# EAGLE board oldclock (EAGLE 7.3.0)

Size 100 x 80 mm. Coordinates in mm from the lower left corner, seen from the top.
Outline: 0,0 100,0 100,80 0,80 0,0
Copper layers (1*16): Top 0.035mm / dielectric 1.5mm / Bottom 0.035mm
Design rules "default": minimum track width 10mil, minimum drill 24mil, track to track 8mil, track to pad 8mil, pad to pad 8mil, via to via 8mil, smd to smd 8mil, copper to edge 40mil, drill to drill 8mil, minimum pad ring 10mil, minimum via ring 8mil, stop-mask expansion 4mil, vias tented up to drill 0mil, thermal gap 10mil

## Footprints (pad centres in the part's own frame; a part is rotated, then mirrored left to right if it is on the bottom)
DIP08 = drill 0.813 pad 1.727 octagon: 1 -3.81,-3.81; 2 -1.27,-3.81; 3 1.27,-3.81; 4 3.81,-3.81; 5 3.81,3.81; 6 1.27,3.81; 7 -1.27,3.81; 8 -3.81,3.81
CAP-PTH-SMALL = drill 0.7 pad 1.651: 1 0,0; 2 2.54,0
BANANA_CONN = drill 3.81 pad 5.461: P$1 0,0
DIL16 = drill 0.813 long: 1 -8.89,-3.81; 2 -6.35,-3.81; 3 -3.81,-3.81; 4 -1.27,-3.81; 5 1.27,-3.81; 6 3.81,-3.81; 7 6.35,-3.81; 8 8.89,-3.81; 9 8.89,3.81; 10 6.35,3.81; 11 3.81,3.81; 12 1.27,3.81; 13 -1.27,3.81; 14 -3.81,3.81; 15 -6.35,3.81; 16 -8.89,3.81
1X30 = drill 1.016 pad 1.88: 1 0,0; 2 2.54,0; 3 5.08,0; 4 7.62,0; 5 10.16,0; 6 12.7,0; 7 15.24,0; 8 17.78,0; 9 20.32,0; 10 22.86,0; 11 25.4,0; 12 27.94,0; 13 30.48,0; 14 33.02,0; 15 35.56,0; 16 38.1,0; 17 40.64,0; 18 43.18,0; 19 45.72,0; 20 48.26,0; 21 50.8,0; 22 53.34,0; 23 55.88,0; 24 58.42,0; 25 60.96,0; 26 63.5,0; 27 66.04,0; 28 68.58,0; 29 71.12,0; 30 73.66,0
1X04 = drill 1.016 pad 1.88 square: 1 0,0 | drill 1.016 pad 1.88: 2 2.54,0; 3 5.08,0; 4 7.62,0
AXIAL-0.4 = drill 0.9 pad 1.88: P$1 -5.08,0; P$2 5.08,0

## Placement (x,y rotation side)
ATTINY85MASTER  TINY85-20-DIP  [DIP08]  72.39,45.72 0 top
ATTINY85SLAVE  TINY85-20-DIP  [DIP08]  91.44,45.72 0 top
C1  0.1 uF  [CAP-PTH-SMALL]  95.25,59.69 0 top
GND  [BANANA_CONN]  96.52,67.31 0 top
IC1  74LS595N  [DIL16]  12.7,33.02 0 top
IC2  74LS595N  [DIL16]  36.83,33.02 0 top
IC3  74LS595N  [DIL16]  62.23,33.02 0 top
IC4  ULN2003AN  [DIL16]  12.7,17.78 0 top
IC5  ULN2003AN  [DIL16]  36.83,17.78 0 top
IC6  ULN2003AN  [DIL16]  60.96,17.78 0 top
IC7  ULN2003AN  [DIL16]  86.36,17.78 0 top
IC8  74LS595N  [DIL16]  86.36,33.02 0 top
JP1  [1X30]  2.54,2.54 0 top
JP2  DS3231  [1X04]  3.81,44.45 0 top
R1  4.7K  [AXIAL-0.4]  91.44,7.62 0 top
R2  4.7K  [AXIAL-0.4]  76.2,7.62 0 top
R3  10K  [AXIAL-0.4]  53.34,41.91 0 top
VCC  [BANANA_CONN]  95.25,74.93 0 top

## Library data of the parts
ATTINY85MASTER ATTINY85SLAVE = SparkFun-DigitalIC; PROD_ID: IC-09445
C1 = SparkFun-Capacitors
GND JP1 JP2 VCC = SparkFun-Connectors
IC1-IC3 IC8 = SparkFun-DigitalIC
IC4-IC7 = uln-udn
R1-R3 = SparkFun-Resistors

## Nets
GND: ATTINY85MASTER.4 ATTINY85SLAVE.4 C1.2 GND.P$1 IC1.8 IC2.8 IC3.8 IC4.8 IC5.8 IC6.8 IC7.8 IC8.8 JP2.1
HALF: IC4.15 JP1.2
N$1: ATTINY85MASTER.5 ATTINY85SLAVE.5 JP2.3 R1.P$1
N$2: ATTINY85MASTER.7 ATTINY85SLAVE.7 JP2.4 R2.P$1
N$3: IC1.9 IC2.14
N$4: IC1.13 IC2.13 IC3.13
N$5: IC2.9 IC3.14
N$6: ATTINY85MASTER.1 ATTINY85SLAVE.1 R3.P$2
N$7: IC1.15 IC4.1
N$8: IC1.1 IC4.2
N$9: IC1.2 IC4.3
N$10: IC1.3 IC4.4
N$11: IC1.4 IC4.5
N$12: IC1.5 IC4.6
N$13: IC1.6 IC4.7
N$14: ATTINY85MASTER.2 IC1.14
N$15: IC1.7 IC5.1
N$16: IC2.15 IC5.2
N$17: IC2.1 IC5.3
N$18: IC2.2 IC5.4
N$19: IC2.3 IC5.5
N$20: IC2.4 IC5.6
N$21: IC2.5 IC5.7
N$22: IC2.7 IC6.2
N$23: IC2.6 IC6.1
N$24: IC3.15 IC6.3
N$25: IC3.1 IC6.4
N$26: IC3.2 IC6.5
N$27: IC3.3 IC6.6
N$28: IC3.4 IC6.7
N$29: IC3.9 IC8.14
N$30: IC7.4 IC8.15
N$31: IC7.5 IC8.1
N$32: IC7.6 IC8.2
N$33: IC7.7 IC8.3
N$34: IC3.5 IC7.1
N$35: IC3.6 IC7.2
N$36: IC3.7 IC7.3
N$39: IC4.14 JP1.3
N$40: IC4.13 JP1.4
N$41: IC4.12 JP1.5
N$42: IC4.11 JP1.6
N$43: IC4.10 JP1.7
N$45: IC5.16 JP1.9
N$46: IC5.15 JP1.10
N$47: IC5.14 JP1.11
N$48: IC5.13 JP1.12
N$49: IC5.12 JP1.13
N$50: IC5.11 JP1.14
N$51: IC5.10 JP1.15
N$52: IC7.16 JP1.24
N$53: IC6.16 JP1.17
N$54: IC6.15 JP1.18
N$55: IC6.14 JP1.19
N$56: JP1.20
N$57: IC6.12 JP1.21
N$58: IC6.11 JP1.22
N$59: IC6.10 JP1.23
N$60: IC7.15 JP1.25
N$61: IC7.14 JP1.26
N$62: IC7.13 JP1.27
N$63: IC7.12 JP1.28
N$64: IC7.11 JP1.29
N$65: IC7.9 JP1.30
TEN: IC4.16 JP1.1
VCC: ATTINY85MASTER.8 ATTINY85SLAVE.8 C1.1 IC1.16 IC2.16 IC3.16 IC8.16 JP2.2 R1.P$2 R2.P$2 R3.P$1 VCC.P$1

## Tracks (layer width: path | path; a pad name or v marks a point on that pad's centre or on a via)
GND  (12 unrouted)
HALF  (1 unrouted)
N$1  (3 unrouted)
N$2  (3 unrouted)
N$3  (1 unrouted)
N$4  (2 unrouted)
N$5  (1 unrouted)
N$6  (2 unrouted)
N$7  (1 unrouted)
N$8  (1 unrouted)
N$9  (1 unrouted)
N$10  (1 unrouted)
N$11  (1 unrouted)
N$12  (1 unrouted)
N$13  (1 unrouted)
N$14  (1 unrouted)
N$15  (1 unrouted)
N$16  (1 unrouted)
N$17  (1 unrouted)
N$18  (1 unrouted)
N$19  (1 unrouted)
N$20  (1 unrouted)
N$21  (1 unrouted)
N$22  (1 unrouted)
N$23  (1 unrouted)
N$24  (1 unrouted)
N$25  (1 unrouted)
N$26  (1 unrouted)
N$27  (1 unrouted)
N$28  (1 unrouted)
N$29  (1 unrouted)
N$30  (1 unrouted)
N$31  (1 unrouted)
N$32  (1 unrouted)
N$33  (1 unrouted)
N$34  (1 unrouted)
N$35  (1 unrouted)
N$36  (1 unrouted)
N$39  (1 unrouted)
N$40  (1 unrouted)
N$41  (1 unrouted)
N$42  (1 unrouted)
N$43  (1 unrouted)
N$45  (1 unrouted)
N$46  (1 unrouted)
N$47  (1 unrouted)
N$48  (1 unrouted)
N$49  (1 unrouted)
N$50  (1 unrouted)
N$51  (1 unrouted)
N$52  (1 unrouted)
N$53  (1 unrouted)
N$54  (1 unrouted)
N$55  (1 unrouted)
N$57  (1 unrouted)
N$58  (1 unrouted)
N$59  (1 unrouted)
N$60  (1 unrouted)
N$61  (1 unrouted)
N$62  (1 unrouted)
N$63  (1 unrouted)
N$64  (1 unrouted)
N$65  (1 unrouted)
TEN  (1 unrouted)
VCC  (11 unrouted)